# Altium PCB PCB.PcbDoc
Units mil, origin at the board's own origin, x right, y up, seen from the top; angles counter-clockwise.
Board outline 6000 x 4000 mil, 2 copper layers (Top Layer, Bottom Layer); 217 components, 93 nets, 539 pads, 0 vias.
Unrouted connection lines stored in the file: 429.
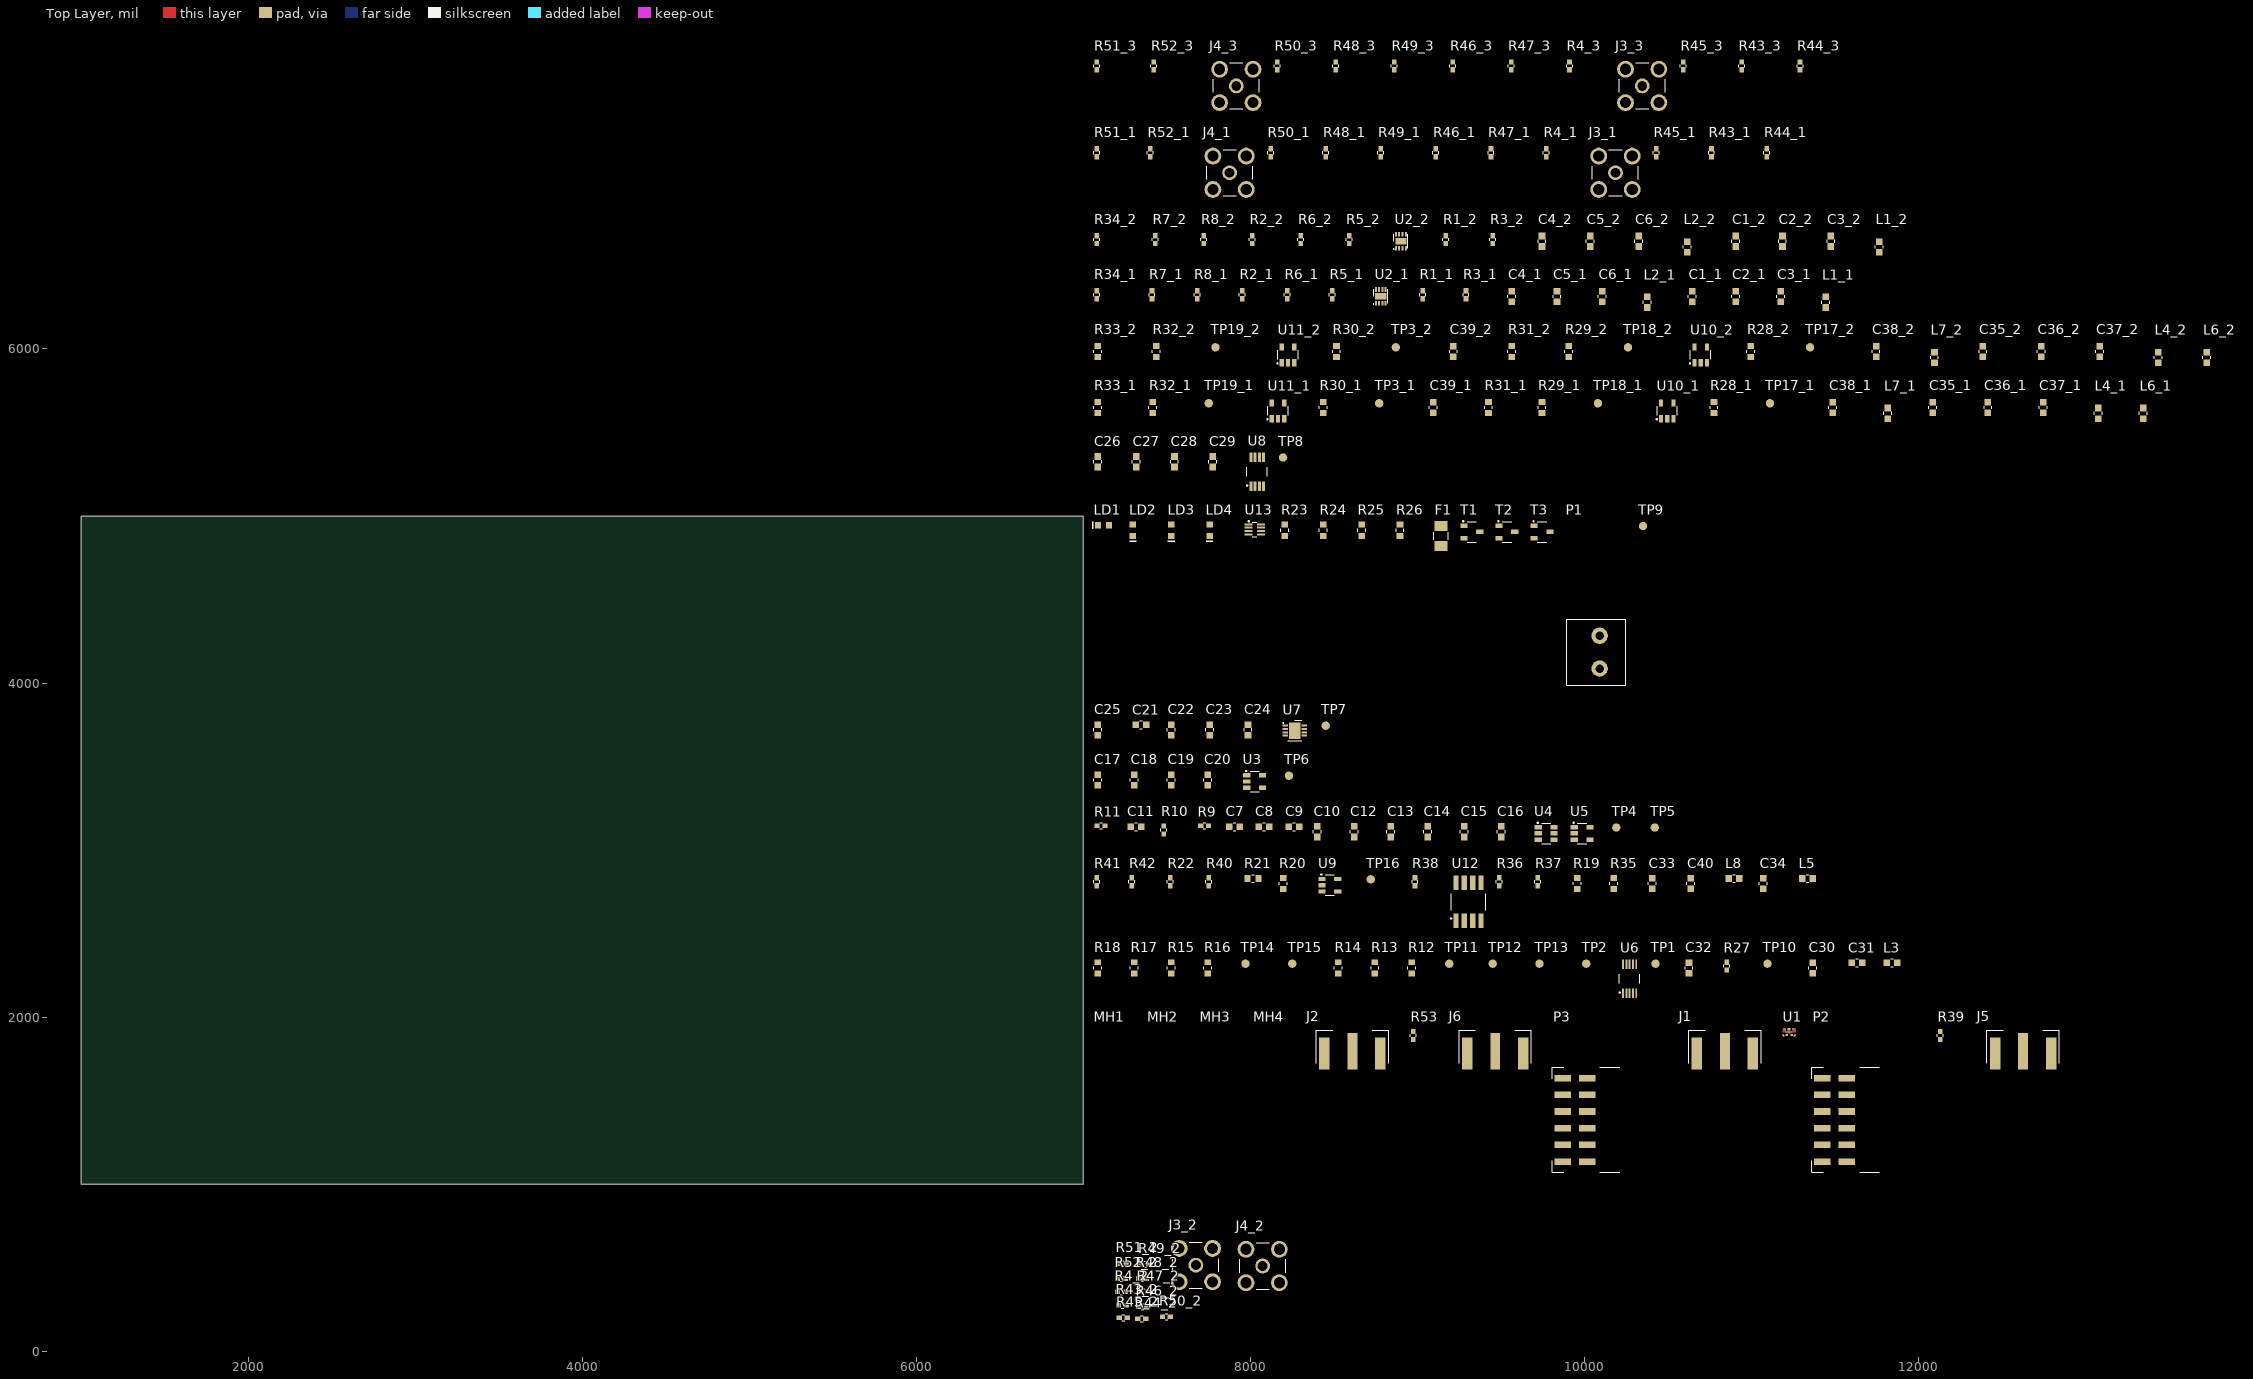
[diagram p0: Top Layer view]
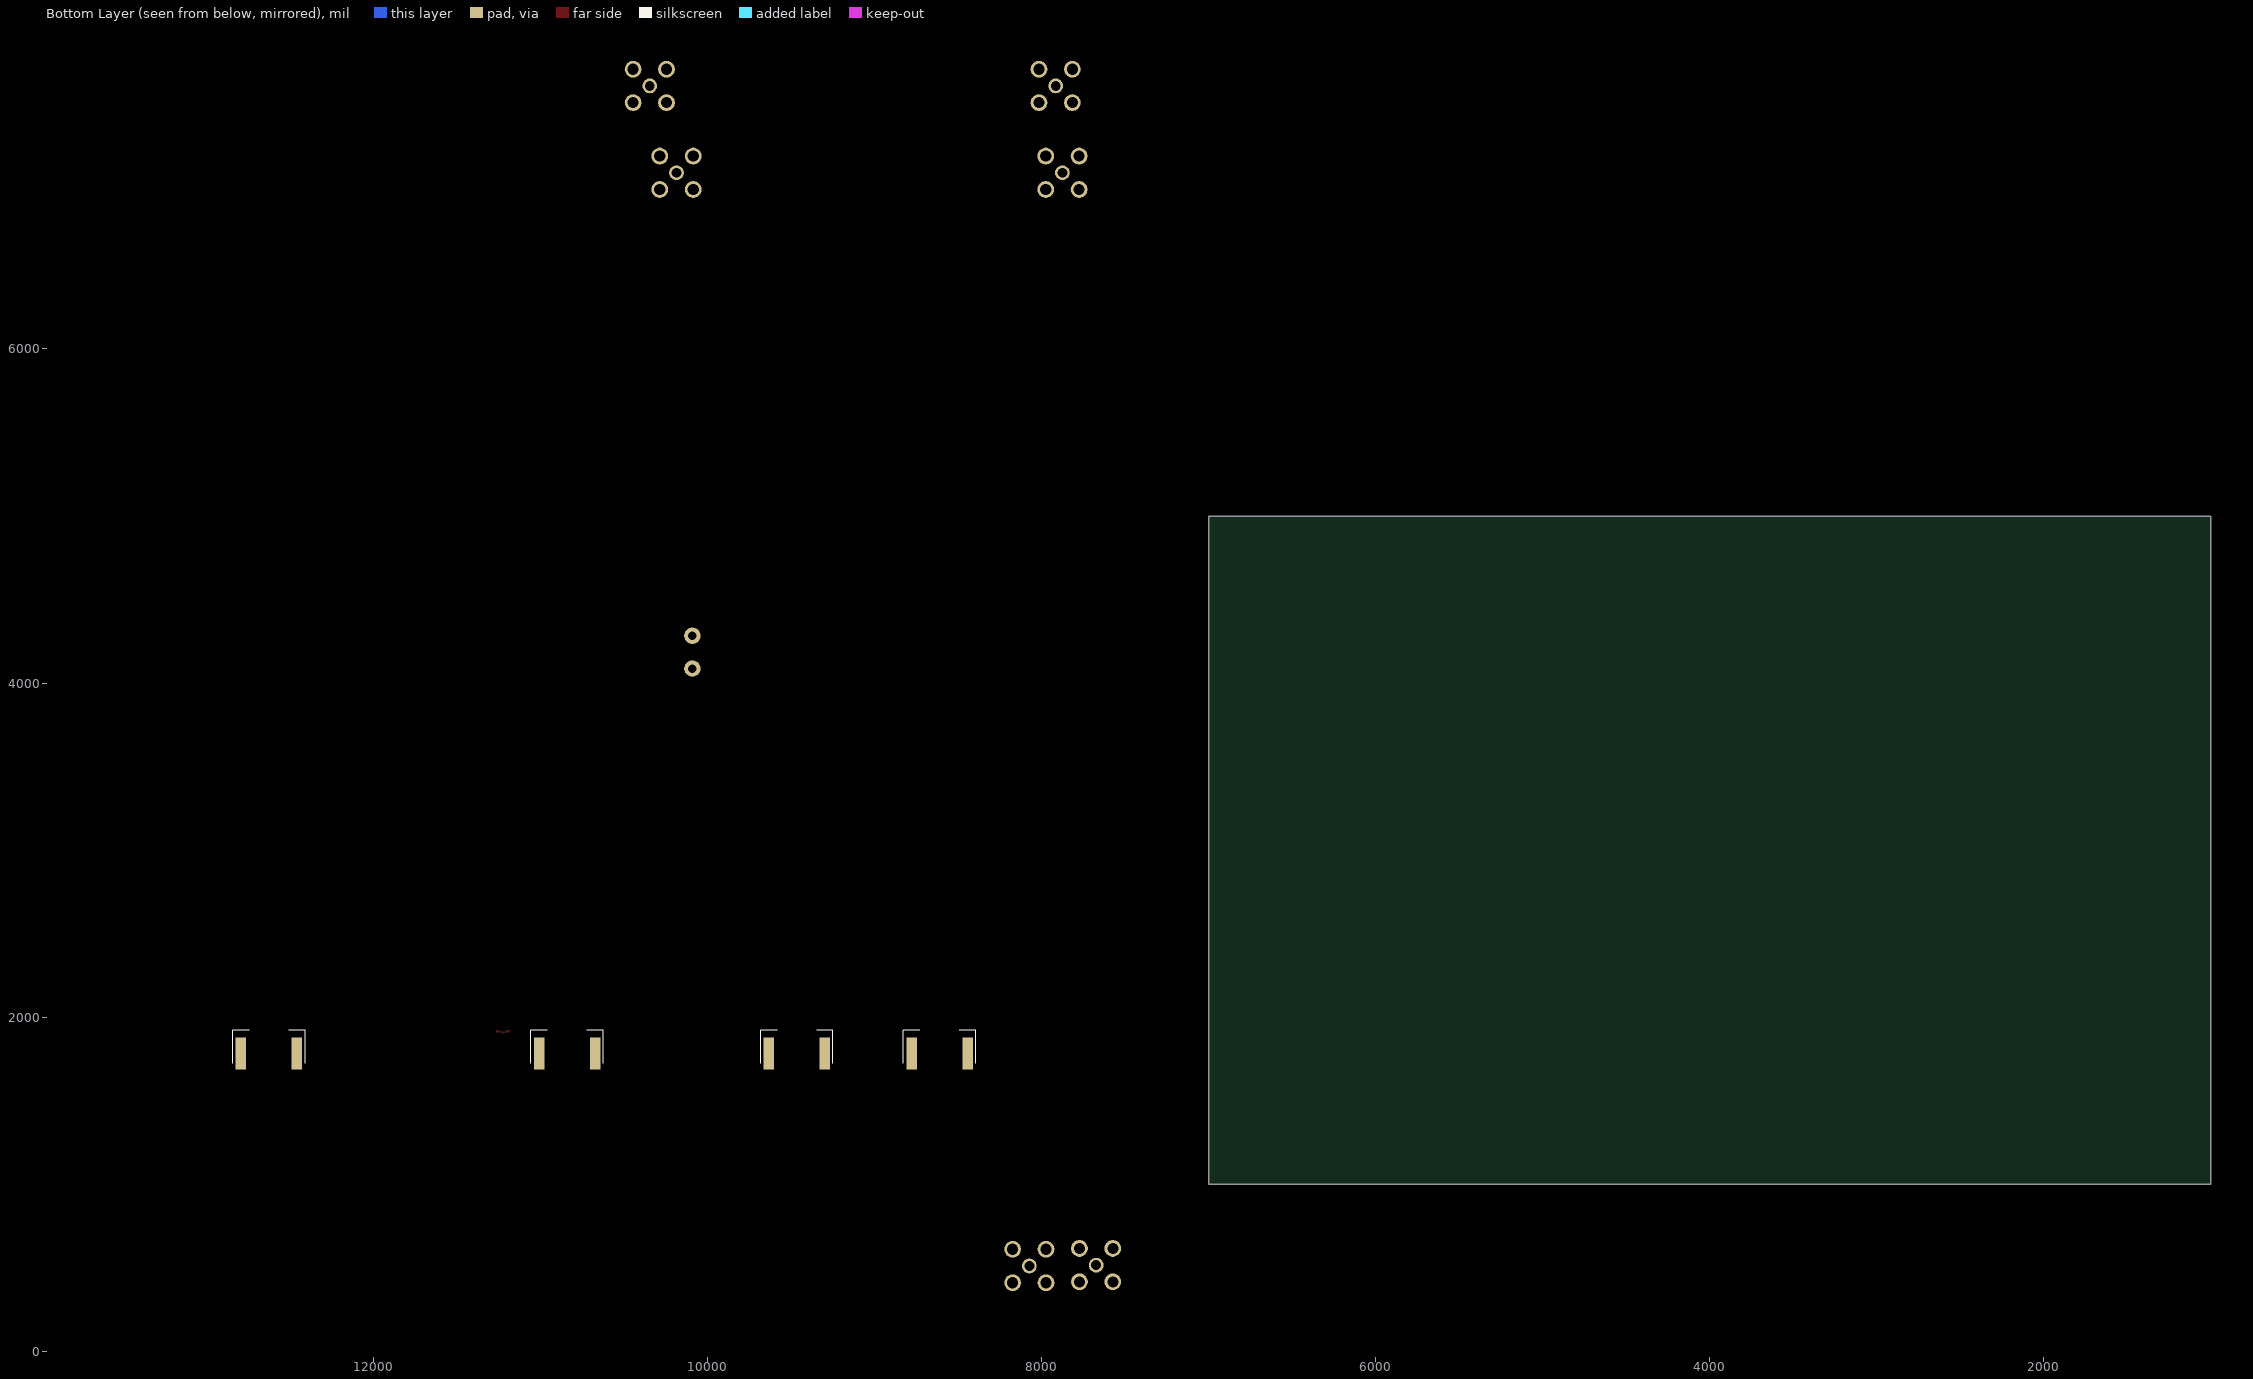
[diagram p1: Bottom Layer view, seen from below]

## Layer stack, top to bottom
Top Solder: solder mask 0.4, Solder Resist, Dk 3.5
Top Layer: signal copper 1.4
Dielectric 1: dielectric 12.6, FR-4, Dk 4.8
Bottom Layer: signal copper 1.4
Bottom Solder: solder mask 0.4, Solder Resist, Dk 3.5

## Board outline
1000,1000 7000,1000 7000,5000 1000,5000

## Design rules (kind name [scope] priority, off if disabled: settings)
Clearance [All] p1: gap=10 ignorepadtopadclearanceinfootprint=FALSE except(0: Arc-Hole Track-Hole SMDPad-Hole THPad-Hole Via-Hole Fill-Hole Poly-Hole Region-Hole Text-Hole)
DiffPairsRouting [All] p1: maxlimit=10 minlimit=10 mostfreqgap=10 toplayer_minwidth=15 toplayer_maxwidth=15 toplayer_prefwidth=15 bottomlayer_minwidth=15 bottomlayer_maxwidth=15 bottomlayer_prefwidth=15 maxuncoupledlength=500
PolygonConnect [All] p1: connectstyle=Relief reliefconductorwidth=10 reliefentries=4 polygonreliefangle="90 Angle" airgapwidth=10
RoomDefinition U_Resistive_Unequal_Power_DividerB2 [InComponentClass('U_Resistive_Unequal_Power_DividerB2')] p1: confinementstyle=ConfineIn formatcopy=TRUE lockcomponents=FALSE outline 7045,7395 11570,7395 11570,7865 7045,7865
RoomDefinition U_Resistive_Unequal_Power_DividerB1 [InComponentClass('U_Resistive_Unequal_Power_DividerB1')] p2: confinementstyle=ConfineIn formatcopy=TRUE lockcomponents=FALSE outline 7053.26,0 8497.76,0 8497.76,715.5 7053.26,715.5
RoomDefinition U_Resistive_Unequal_Power_DividerA [InComponentClass('U_Resistive_Unequal_Power_DividerA')] p3: confinementstyle=ConfineIn formatcopy=TRUE lockcomponents=FALSE outline 7045,6875 11350,6875 11350,7345 7045,7345
RoomDefinition U_Power_VREF_P1V25 [InComponentClass('U_Power_VREF_P1V25')] p4: confinementstyle=ConfineIn formatcopy=TRUE lockcomponents=FALSE outline 7045,5135 8345,5135 8345,5495 7045,5495
RoomDefinition U_Power_Supply [InComponentClass('U_Power_Supply')] p5: confinementstyle=ConfineIn formatcopy=TRUE lockcomponents=FALSE outline 7045,3940 10500,3940 10500,5085 7045,5085
RoomDefinition U_Power_P3V3 [InComponentClass('U_Power_P3V3')] p6: confinementstyle=ConfineIn formatcopy=TRUE lockcomponents=FALSE outline 7045,3640 8600,3640 8600,3890 7045,3890
RoomDefinition U_Power_P2V5 [InComponentClass('U_Power_P2V5')] p7: confinementstyle=ConfineIn formatcopy=TRUE lockcomponents=FALSE outline 7045,3330 8380,3330 8380,3590 7045,3590
RoomDefinition U_Power_N2V5 [InComponentClass('U_Power_N2V5')] p8: confinementstyle=ConfineIn formatcopy=TRUE lockcomponents=FALSE outline 7045,3020 10570,3020 10570,3280 7045,3280
RoomDefinition U_External_Trigger_Buffer [InComponentClass('U_External_Trigger_Buffer')] p9: confinementstyle=ConfineIn formatcopy=TRUE lockcomponents=FALSE outline 7045,2515 11440,2515 11440,2970 7045,2970
RoomDefinition U_DAC [InComponentClass('U_DAC')] p10: confinementstyle=ConfineIn formatcopy=TRUE lockcomponents=FALSE outline 7045,2095 11945,2095 11945,2465 7045,2465
RoomDefinition U_ComparatorB [InComponentClass('U_ComparatorB')] p11: confinementstyle=ConfineIn formatcopy=TRUE lockcomponents=FALSE outline 7045,6540 11970,6540 11970,6825 7045,6825
RoomDefinition U_ComparatorA [InComponentClass('U_ComparatorA')] p12: confinementstyle=ConfineIn formatcopy=TRUE lockcomponents=FALSE outline 7045,6210 11630,6210 11630,6495 7045,6495
RoomDefinition U_Bipolar_offset_shifterB [InComponentClass('U_Bipolar_offset_shifterB')] p13: confinementstyle=ConfineIn formatcopy=TRUE lockcomponents=FALSE outline 7045,5875 13940,5875 13940,6165 7045,6165
RoomDefinition U_Bipolar_offset_shifterA [InComponentClass('U_Bipolar_offset_shifterA')] p14: confinementstyle=ConfineIn formatcopy=TRUE lockcomponents=FALSE outline 7045,5540 13540,5540 13540,5830 7045,5830
RoomDefinition Main [InComponentClass('Main')] p15: confinementstyle=ConfineIn formatcopy=TRUE lockcomponents=FALSE outline 7045,1060 12920,1060 12920,2050 7045,2050
RoutingVias [All] p1: holewidth=28 width=50 viastyle="Through Hole" minholewidth=28 minwidth=50 maxholewidth=28 maxwidth=50
SolderMaskExpansion [All] p1: expansion=4 istentingtop=FALSE
Width [All] p1: maxlimit=10 minlimit=10 preferedwidth=10
29 further rules are at their usual default settings.

## Classes and differential pairs
channel class Resistive_Unequal_Power_Divider: U_Resistive_Unequal_Power_DividerA U_Resistive_Unequal_Power_DividerB1 U_Resistive_Unequal_Power_DividerB2
channel class Comparator: U_ComparatorA U_ComparatorB
channel class Bipolar_Offset_Shifter: U_Bipolar_offset_shifterA U_Bipolar_offset_shifterB
component class U_Resistive_Unequal_Power_DividerB2: J3_3 J4_3 R4_3 R43_3 R44_3 R45_3 R46_3 R47_3 R48_3 R49_3 R50_3 R51_3 R52_3
component class U_Resistive_Unequal_Power_DividerB1: J3_2 J4_2 R4_2 R43_2 R44_2 R45_2 R46_2 R47_2 R48_2 R49_2 R50_2 R51_2 R52_2
component class U_Resistive_Unequal_Power_DividerA: J3_1 J4_1 R4_1 R43_1 R44_1 R45_1 R46_1 R47_1 R48_1 R49_1 R50_1 R51_1 R52_1
component class U_Power_VREF_P1V25: C26 C27 C28 C29 TP8 U8
component class U_Power_Supply: F1 LD1 LD2 LD3 LD4 P1 R23 R24 R25 R26 T1 T2 T3 TP9 U13
component class U_Power_P3V3: C21 C22 C23 C24 C25 TP7 U7
component class U_Power_P2V5: C17 C18 C19 C20 TP6 U3
component class U_Power_N2V5: C7 C8 C9 C10 C11 C12 C13 C14 C15 C16 R9 R10 R11 TP4 TP5 U4 U5
component class U_External_Trigger_Buffer: C33 C34 C40 L5 L8 R19 R20 R21 R22 R35 R36 R37 R38 R40 R41 R42 TP16 U9 U12
component class U_DAC: C30 C31 C32 L3 R12 R13 R14 R15 R16 R17 R18 R27 TP1 TP2 TP10 TP11 TP12 TP13 TP14 TP15 U6
component class U_ComparatorB: C1_2 C2_2 C3_2 C4_2 C5_2 C6_2 L1_2 L2_2 R1_2 R2_2 R3_2 R5_2 R6_2 R7_2 R8_2 R34_2 U2_2
component class U_ComparatorA: C1_1 C2_1 C3_1 C4_1 C5_1 C6_1 L1_1 L2_1 R1_1 R2_1 R3_1 R5_1 R6_1 R7_1 R8_1 R34_1 U2_1
component class U_Bipolar_offset_shifterB: C35_2 C36_2 C37_2 C38_2 C39_2 L4_2 L6_2 L7_2 R28_2 R29_2 R30_2 R31_2 R32_2 R33_2 TP3_2 TP17_2 TP18_2 TP19_2 U10_2 U11_2
component class U_Bipolar_offset_shifterA: C35_1 C36_1 C37_1 C38_1 C39_1 L4_1 L6_1 L7_1 R28_1 R29_1 R30_1 R31_1 R32_1 R33_1 TP3_1 TP17_1 TP18_1 TP19_1 U10_1 U11_1
component class Main: J1 J2 J5 J6 MH1 MH2 MH3 MH4 P2 P3 R39 R53 U1
differential pair COMP2_OUT: +COMP2_OUT_P -COMP2_OUT_N
differential pair COMP1_OUT: +COMP1_OUT_P -COMP1_OUT_N
differential pair BUF_OUT_ZBRD: +BUF_OUT_ZBRD_P -BUF_OUT_ZBRD_N

## Components (designator, comment, footprint, x,y, rotation, side; value= is the part's Value field where it differs from the comment)
C1_1 "1uF" CAPC0603X90N 10645,6315 r90 top (schematic designator C1)
C1_2 "1uF" CAPC0603X90N 10905,6645 r90 top (schematic designator C1)
C2_1 "100nF" CAPC0603X90N 10905,6315 r90 top (schematic designator C2)
C2_2 "100nF" CAPC0603X90N 11185,6645 r90 top (schematic designator C2)
C3_1 "100pF" CAPC0603X90N 11175,6315 r90 top (schematic designator C3)
C3_2 "100pF" CAPC0603X90N 11475,6645 r90 top (schematic designator C3)
C4_1 "1uF" CAPC0603X90N 9565,6315 r90 top (schematic designator C4)
C4_2 "1uF" CAPC0603X90N 9745,6645 r90 top (schematic designator C4)
C5_1 "100nF" CAPC0603X90N 9835,6315 r90 top (schematic designator C5)
C5_2 "100nF" CAPC0603X90N 10035,6645 r90 top (schematic designator C5)
C6_1 "100pF" CAPC0603X90N 10105,6315 r90 top (schematic designator C6)
C6_2 "100pF" CAPC0603X90N 10325,6645 r90 top (schematic designator C6)
C7 "2.2uF" CAPC0603X90N 7905,3140 r0 top
C8 "100nF" CAPC0603X90N 8080,3140 r0 top
C9 "100nF" CAPC0603X90N 8260,3140 r0 top
C10 "2.2uF" CAPC0603X90N 8400,3110 r90 top
C11 "1uF" CAPC0603X90N 7315,3140 r0 top
C12 "2.2uF" CAPC0603X90N 8620,3110 r90 top
C13 "100nF" CAPC0603X90N 8840,3110 r90 top
C14 "DNP" CAPC0603X90N 9060,3110 r90 top
C15 "100nF" CAPC0603X90N 9280,3110 r90 top
C16 "2.2uF" CAPC0603X90N 9500,3110 r90 top
C17 "2.2uF" CAPC0603X90N 7085,3420 r90 top
C18 "100nF" CAPC0603X90N 7305,3420 r90 top
C19 "100nF" CAPC0603X90N 7525,3420 r90 top
C20 "2.2uF" CAPC0603X90N 7745,3420 r90 top
C21 "4.7uF" CAPC0603X90N 7345,3750 r0 top
C22 "100nF" CAPC0603X90N 7525,3720 r90 top
C23 "100nF" CAPC0603X90N 7755,3720 r90 top
C24 "4.7uF" CAPC0603X90N 7985,3720 r90 top
C25 "DNP" CAPC0603X90N 7085,3720 r90 top
C26 "1uF" CAPC0603X90N 7085,5325 r90 top
C27 "100nF" CAPC0603X90N 7315,5325 r90 top
C28 "100nF" CAPC0603X90N 7545,5325 r90 top
C29 "1uF" CAPC0603X90N 7775,5325 r90 top
C30 "10uF" CAPC0603X90N 11365,2295 r90 top
C31 "100nF" CAPC0603X90N 11630,2325 r0 top
C32 "100nF" CAPC0603X90N 10625,2295 r90 top
C33 "1uF" CAPC0603X90N 10405,2800 r90 top
C34 "100nF" CAPC0603X90N 11070,2800 r90 top
C35_1 "100nF" CAPC0603X90N 12085,5650 r90 top (schematic designator C35)
C35_2 "100nF" CAPC0603X90N 12385,5985 r90 top (schematic designator C35)
C36_1 "100nF" CAPC0603X90N 12415,5650 r90 top (schematic designator C36)
C36_2 "100nF" CAPC0603X90N 12735,5985 r90 top (schematic designator C36)
C37_1 "100nF" CAPC0603X90N 12745,5650 r90 top (schematic designator C37)
C37_2 "100nF" CAPC0603X90N 13085,5985 r90 top (schematic designator C37)
C38_1 "100nF" CAPC0603X90N 11485,5650 r90 top (schematic designator C38)
C38_2 "100nF" CAPC0603X90N 11745,5985 r90 top (schematic designator C38)
C39_1 "DNP" CAPC0603X90N 9095,5650 r90 top (schematic designator C39)
C39_2 "DNP" CAPC0603X90N 9215,5985 r90 top (schematic designator C39)
C40 "100nF" CAPC0603X90N 10635,2800 r90 top
F1 "C1Q 1.5" FUSE1206 9140,4880 r90 top
J1 "CONSMA020.062-G" CONSMA020.062-G 10840,1685 r0 top
J2 "CONSMA020.062-G" CONSMA020.062-G 8610,1685 r0 top
J3_1 "901-144-8RFX" 901-144-8RFX 10185,7055 r0 top (schematic designator J3)
J3_2 "901-144-8RFX" 901-144-8RFX 7672.76,515 r0 top (schematic designator J3)
J3_3 "901-144-8RFX" 901-144-8RFX 10345,7575 r0 top (schematic designator J3)
J4_1 "901-144-8RFX" 901-144-8RFX 7875,7055 r0 top (schematic designator J4)
J4_2 "901-144-8RFX" 901-144-8RFX 8072.76,510 r0 top (schematic designator J4)
J4_3 "901-144-8RFX" 901-144-8RFX 7915,7575 r0 top (schematic designator J4)
J5 "CONSMA020.062-G" CONSMA020.062-G 12625,1685 r0 top
J6 "CONSMA020.062-G" CONSMA020.062-G 9465,1685 r0 top
L1_1 "120R@100MHz" INDC0603X90N 11445,6280 r90 top (schematic designator L1)
L1_2 "120R@100MHz" INDC0603X90N 11765,6610 r90 top (schematic designator L1)
L2_1 "120R@100MHz" INDC0603X90N 10375,6280 r90 top (schematic designator L2)
L2_2 "120R@100MHz" INDC0603X90N 10615,6610 r90 top (schematic designator L2)
L3 "120R@100MHz" INDC0603X90N 11840,2325 r0 top
L4_1 "120R@100MHz" INDC0603X90N 13075,5615 r90 top (schematic designator L4)
L4_2 "120R@100MHz" INDC0603X90N 13435,5950 r90 top (schematic designator L4)
L5 "120R@100MHz" INDC0603X90N 11335,2830 r0 top
L6_1 "120R@100MHz" INDC0603X90N 13345,5615 r90 top (schematic designator L6)
L6_2 "120R@100MHz" INDC0603X90N 13725,5950 r90 top (schematic designator L6)
L7_1 "120R@100MHz" INDC0603X90N 11815,5615 r90 top (schematic designator L7)
L7_2 "120R@100MHz" INDC0603X90N 12095,5950 r90 top (schematic designator L7)
L8 "120R@100MHz" INDC0603X90N 10895,2830 r0 top
LD1 "Green" LED_0603X60N 7120,4945 r0 top
LD2 "Green" LED_0603X60N 7295,4915 r90 top
LD3 "Green" LED_0603X60N 7525,4915 r90 top
LD4 "Green" LED_0603X60N 7755,4915 r90 top
MH1 "M3" MH-M3 7185,1810 r0 top
MH2 "M3" MH-M3 7505,1810 r0 top
MH3 "M3" MH-M3 7820,1810 r0 top
MH4 "M3" MH-M3 8140,1810 r0 top
P1 "SCREWTERM_THT_2X1H_5P08MM" SCREWERM_THT_2X1H_5P08MM 10090,4185 r90 top
P2 "WURTH_610112249121" WURTH_610112249121 11745,1385 r90 top
P3 "WURTH_610112249121" WURTH_610112249121 10190,1385 r90 top
R1_1 "DNP" RESC0402X40N 9030,6325 r90 top (schematic designator R1)
R1_2 "DNP" RESC0402X40N 9170,6655 r90 top (schematic designator R1)
R2_1 "49R9" RESC0402X40N 7950,6325 r90 top (schematic designator R2)
R2_2 "49R9" RESC0402X40N 8010,6655 r90 top (schematic designator R2)
R3_1 "DNP" RESC0402X40N 9290,6325 r90 top (schematic designator R3)
R3_2 "DNP" RESC0402X40N 9450,6655 r90 top (schematic designator R3)
R4_1 "DNP" RESC0402X40N 9770,7175 r90 top (schematic designator R4)
R4_2 "DNP" RESC0402X40N 7227.76,355 r0 top (schematic designator R4)
R4_3 "DNP" RESC0402X40N 9910,7695 r90 top (schematic designator R4)
R5_1 "0R" RESC0402X40N 8490,6325 r90 top (schematic designator R5)
R5_2 "0R" RESC0402X40N 8590,6655 r90 top (schematic designator R5)
R6_1 "0R" RESC0402X40N 8220,6325 r90 top (schematic designator R6)
R6_2 "0R" RESC0402X40N 8300,6655 r90 top (schematic designator R6)
R7_1 "DNP" RESC0402X40N 7410,6325 r90 top (schematic designator R7)
R7_2 "DNP" RESC0402X40N 7430,6655 r90 top (schematic designator R7)
R8_1 "DNP" RESC0402X40N 7680,6325 r90 top (schematic designator R8)
R8_2 "DNP" RESC0402X40N 7720,6655 r90 top (schematic designator R8)
R9 "DNP" RESC0402X40N 7725,3145 r0 top
R10 "DNP" RESC0402X40N 7480,3120 r90 top
R11 "DNP" RESC0402X40N 7105,3145 r0 top
R12 "27R" RESC0603X60N 8965,2295 r90 top
R13 "27R" RESC0603X60N 8745,2295 r90 top
R14 "27R" RESC0603X60N 8525,2295 r90 top
R15 "10k" RESC0603X60N 7525,2295 r90 top
R16 "10k" RESC0603X60N 7745,2295 r90 top
R17 "27R" RESC0603X60N 7305,2295 r90 top
R18 "27R" RESC0603X60N 7085,2295 r90 top
R19 "DNP" RESC0603X60N 9955,2800 r90 top
R20 "27R" RESC0603X60N 8195,2800 r90 top
R21 "0R" RESC0603X60N 8015,2830 r0 top
R22 "49R9" RESC0402X40N 7520,2810 r90 top
R23 "1k" RESC0603X60N 8205,4915 r90 top
R24 "100R" RESC0603X60N 8435,4915 r90 top
R25 "100R" RESC0603X60N 8665,4915 r90 top
R26 "100R" RESC0603X60N 8895,4915 r90 top
R27 "0R" RESC0402X40N 10850,2305 r90 top
R28_1 "100k" RESC0603X60N 10775,5650 r90 top (schematic designator R28)
R28_2 "100k" RESC0603X60N 10995,5985 r90 top (schematic designator R28)
R29_1 "10k" RESC0603X60N 9745,5650 r90 top (schematic designator R29)
R29_2 "10k" RESC0603X60N 9905,5985 r90 top (schematic designator R29)
R30_1 "100k" RESC0603X60N 8435,5650 r90 top (schematic designator R30)
R30_2 "100k" RESC0603X60N 8515,5985 r90 top (schematic designator R30)
R31_1 "10k" RESC0603X60N 9425,5650 r90 top (schematic designator R31)
R31_2 "10k" RESC0603X60N 9565,5985 r90 top (schematic designator R31)
R32_1 "10k" RESC0603X60N 7415,5650 r90 top (schematic designator R32)
R32_2 "10k" RESC0603X60N 7435,5985 r90 top (schematic designator R32)
R33_1 "10k" RESC0603X60N 7085,5650 r90 top (schematic designator R33)
R33_2 "10k" RESC0603X60N 7085,5985 r90 top (schematic designator R33)
R34_1 "49R9" RESC0402X40N 7080,6325 r90 top (schematic designator R34)
R34_2 "49R9" RESC0402X40N 7080,6655 r90 top (schematic designator R34)
R35 "DNP" RESC0603X60N 10175,2800 r90 top
R36 "DNP" RESC0402X40N 9490,2810 r90 top
R37 "DNP" RESC0402X40N 9720,2810 r90 top
R38 "0R" RESC0402X40N 8985,2810 r90 top
R39 "DNP" RESC0402X40N 12130,1890 r90 top
R40 "0R" RESC0402X40N 7750,2810 r90 top
R41 "DNP" RESC0402X40N 7080,2810 r90 top
R42 "DNP" RESC0402X40N 7290,2810 r90 top
R43_1 "1R43" RESC0402X40N 10760,7175 r90 top (schematic designator R43)
R43_2 "1R43" RESC0402X40N 7232.76,275 r0 top (schematic designator R43)
R43_3 "1R43" RESC0402X40N 10940,7695 r90 top (schematic designator R43)
R44_1 "1R43" RESC0402X40N 11090,7175 r90 top (schematic designator R44)
R44_2 "1R43" RESC0402X40N 7349.13,195 r0 top (schematic designator R44)
R44_3 "1R43" RESC0402X40N 11290,7695 r90 top (schematic designator R44)
R45_1 "845R" RESC0402X40N 10430,7175 r90 top (schematic designator R45)
R45_2 "845R" RESC0402X40N 7237.76,200 r0 top (schematic designator R45)
R45_3 "845R" RESC0402X40N 10590,7695 r90 top (schematic designator R45)
R46_1 "53R6" RESC0402X40N 9110,7175 r90 top (schematic designator R46)
R46_2 "53R6" RESC0402X40N 7354.13,265 r0 top (schematic designator R46)
R46_3 "53R6" RESC0402X40N 9210,7695 r90 top (schematic designator R46)
R47_1 "DNP" RESC0402X40N 9440,7175 r90 top (schematic designator R47)
R47_2 "DNP" RESC0402X40N 7359.13,355 r0 top (schematic designator R47)
R47_3 "DNP" RESC0402X40N 9560,7695 r90 top (schematic designator R47)
R48_1 "1R43" RESC0402X40N 8450,7175 r90 top (schematic designator R48)
R48_2 "1R43" RESC0402X40N 7354.13,435 r0 top (schematic designator R48)
R48_3 "1R43" RESC0402X40N 8510,7695 r90 top (schematic designator R48)
R49_1 "1R43" RESC0402X40N 8780,7175 r90 top (schematic designator R49)
R49_2 "1R43" RESC0402X40N 7367.76,520 r0 top (schematic designator R49)
R49_3 "1R43" RESC0402X40N 8860,7695 r90 top (schematic designator R49)
R50_1 "845R" RESC0402X40N 8120,7175 r90 top (schematic designator R50)
R50_2 "845R" RESC0402X40N 7496.38,205 r0 top (schematic designator R50)
R50_3 "845R" RESC0402X40N 8160,7695 r90 top (schematic designator R50)
R51_1 "53R6" RESC0402X40N 7080,7175 r90 top (schematic designator R51)
R51_2 "53R6" RESC0402X40N 7232.76,525 r0 top (schematic designator R51)
R51_3 "53R6" RESC0402X40N 7080,7695 r90 top (schematic designator R51)
R52_1 "DNP" RESC0402X40N 7400,7175 r90 top (schematic designator R52)
R52_2 "DNP" RESC0402X40N 7227.76,435 r0 top (schematic designator R52)
R52_3 "DNP" RESC0402X40N 7420,7695 r90 top (schematic designator R52)
R53 "DNP" RESC0402X40N 8975,1890 r90 top
T1 "AO3401A" SOT23-3 9325,4905 r0 top
T2 "AO3406" SOT23-3 9535,4905 r0 top
T3 "AO3406" SOT23-3 9745,4905 r0 top
TP1 "TestPoint" TESTPOINT_SMD_C1P27MM 10425,2320 r0 top
TP2 "TestPoint" TESTPOINT_SMD_C1P27MM 10010,2320 r90 top
TP3_1 "TestPoint" TESTPOINT_SMD_C1P27MM 8770,5675 r90 top (schematic designator TP3)
TP3_2 "TestPoint" TESTPOINT_SMD_C1P27MM 8870,6010 r90 top (schematic designator TP3)
TP4 "TestPoint" TESTPOINT_SMD_C1P27MM 10190,3135 r90 top
TP5 "TestPoint" TESTPOINT_SMD_C1P27MM 10420,3135 r90 top
TP6 "TestPoint" TESTPOINT_SMD_C1P27MM 8230,3445 r90 top
TP7 "TestPoint" TESTPOINT_SMD_C1P27MM 8450,3745 r90 top
TP8 "TestPoint" TESTPOINT_SMD_C1P27MM 8195,5350 r90 top
TP9 "TestPoint" TESTPOINT_SMD_C1P27MM 10350,4940 r90 top
TP10 "TestPoint" TESTPOINT_SMD_C1P27MM 11095,2320 r90 top
TP11 "TestPoint" TESTPOINT_SMD_C1P27MM 9190,2320 r90 top
TP12 "TestPoint" TESTPOINT_SMD_C1P27MM 9450,2320 r90 top
TP13 "TestPoint" TESTPOINT_SMD_C1P27MM 9730,2320 r90 top
TP14 "TestPoint" TESTPOINT_SMD_C1P27MM 7970,2320 r90 top
TP15 "TestPoint" TESTPOINT_SMD_C1P27MM 8250,2320 r90 top
TP16 "TestPoint" TESTPOINT_SMD_C1P27MM 8720,2825 r90 top
TP17_1 "TestPoint" TESTPOINT_SMD_C1P27MM 11110,5675 r90 top (schematic designator TP17)
TP17_2 "TestPoint" TESTPOINT_SMD_C1P27MM 11350,6010 r90 top (schematic designator TP17)
TP18_1 "TestPoint" TESTPOINT_SMD_C1P27MM 10080,5675 r90 top (schematic designator TP18)
TP18_2 "TestPoint" TESTPOINT_SMD_C1P27MM 10260,6010 r90 top (schematic designator TP18)
TP19_1 "TestPoint" TESTPOINT_SMD_C1P27MM 7750,5675 r90 top (schematic designator TP19)
TP19_2 "TestPoint" TESTPOINT_SMD_C1P27MM 7790,6010 r90 top (schematic designator TP19)
U1 "PS1608GT2-R50-T1" PS1608GT2R50T1 11225,1910 r0 top
U2_1 "TLV3801" WSON50P200X200X80-9N 8780,6315 r90 top (schematic designator U2)
U2_2 "TLV3801" WSON50P200X200X80-9N 8900,6645 r90 top (schematic designator U2)
U3 "ADM7160AUJZ-2.5" SOT23-5 8025,3410 r0 top
U4 "LM2776" SOT23-6 9770,3100 r0 top
U5 "ADP7182AUJZ-2.5" SOT23-5 9985,3100 r0 top
U6 "AD5623RBRMZ-3" MSOP50P490X110-10N 10270,2230 r90 top
U7 "ADM7170ACPZ-3.3" LFCSP50P300X300X80-9N-D 8265,3715 r0 top
U8 "LTC6652BHMS8-1.25" MSOP65P490X110-8N 8040,5265 r90 top
U9 "SN74LVC1G04MDBVREP" SOT23-5 8475,2790 r0 top
U10_1 "TLV333IDBV" SOT23-5 10495,5630 r90 top (schematic designator U10)
U10_2 "TLV333IDBV" SOT23-5 10695,5965 r90 top (schematic designator U10)
U11_1 "TLV333IDBV" SOT23-5 8165,5630 r90 top (schematic designator U11)
U11_2 "TLV333IDBV" SOT23-5 8225,5965 r90 top (schematic designator U11)
U12 "ADN4661BRZ" SOIC-8 9305,2690 r90 top
U13 "LTC4360ISC8-2" SC70-8 8025,4920 r0 top

## Footprints (in the part's own frame and the unit in brackets; to place one, negate y for a bottom-side part, rotate by r counter-clockwise, add the part's x,y. Pads: shape width x height; smd on the part's side, far side on the other; paste and mask are expansions set on the pad)
901-144-8RFX [mm] "SMA, Straight, 50 Ohm"
  round 2.25 hole 1.5: 1(0,0)
  round 2.55 hole 1.7: 2(-2.54,-2.54) 2(-2.54,2.54) 2(2.54,-2.54) 2(2.54,2.54)
  silkscreen extent -3.5,-3.5 3.5,3.5, body extent -3.5,-3.5 3.5,3.5, height 9.53
CAPC0603X90N [mm] "Chip Capacitor, Body 1.6x0.8mm, IPC Medium Density"
  rect 1x1 smd: 1(-0.8,0) 2(0.8,0)
  silkscreen extent -0.2,-0.6 0.2,0.6, body extent -0.8,-0.4 0.8,0.4, height 0.9
CONSMA020.062-G [mm] "SMA FEMALE EDGE MOUNT FOR 0.062\" BOARD"
  rect 1.5x5.6 smd: 1(0,2.8)
  rect 1.6x4.9 smd: 2(-4.26,2.45) 2(4.26,2.45)
  rect 1.6x4.9 smd far side: 2(-4.26,2.45) 2(4.26,2.45)
  silkscreen extent -5.5,1 5.5,6, body extent -4.76,-9.5 4.76,4.7, height 4.35
FUSE1206 [mm] "Surface Mount Fuses 1206 SMT Fuse Very Fast Acting"
  rect 1.52x2.03 smd: 1(-1.52,0) 2(1.52,0)
  silkscreen extent -0.55,-1.1 0.55,1.1, body extent -1.6,-0.79 1.6,0.79, height 0.78
INDC0603X90N [mm] "Chip Inductor, Body 1.6x0.8mm, IPC Medium Density"
  rect 1x1 smd: 1(-0.8,0) 2(0.8,0)
  silkscreen extent -0.2,-0.6 0.2,0.6, body extent -0.8,-0.4 0.8,0.4, height 0.9
LED_0603X60N [mm] "Chip LED, 2-Leads, Body 1.6x0.8mm, IPC Medium Density"
  rect 0.9x1 smd: 1(-0.85,0) 2(0.85,0)
  silkscreen extent -1.65,-0.51 -1.65,0.49, body extent -0.8,-0.4 0.8,0.4, height 0.6
LFCSP50P300X300X80-9N-D [mm] "LFCSP50P300X300X80-9N-D / LFCSP, 8-Leads, Body 3x3mm, Pitch 0.5mm, Exposed Pad"
  rect 0.85x0.3 smd: 1(-1.45,0.75) 2(-1.45,0.25) 3(-1.45,-0.25) 4(-1.45,-0.75) 5(1.45,-0.75) 6(1.45,-0.25) 7(1.45,0.25) 8(1.45,0.75)
  rect 1.7x2.54 smd: 9(0,0)
  silkscreen extent -1.8,-1.55 1.05,1.55, body extent -1.55,-1.5 1.55,1.5, height 0.8
MH-M3 [mm] "M3 screw Mounting Hole"
  round 0 hole 3.2 unplated mask+1.8: MH(0,0)
MSOP50P490X110-10N [mm] "MSOP, 10-Leads, Body 3x3mm, Pitch 0.5mm"
  rect 1.45x0.3 smd: 1(-2.225,1) 2(-2.225,0.5) 3(-2.225,0) 4(-2.225,-0.5) 5(-2.225,-1) 6(2.225,-1) 7(2.225,-0.5) 8(2.225,0) 9(2.225,0.5) 10(2.225,1)
  silkscreen extent -2.15,-1.55 0.7,1.57, body extent -2.45,-1.5 2.45,1.5, height 1.1
MSOP65P490X110-8N [mm] "MSOP65P490X110-8N / MSOP, 8-Leads, Body 3x3mm, Pitch 0.65mm"
  rect 1.425x0.45 smd: 1(-2.212,0.975) 2(-2.212,0.325) 3(-2.212,-0.325) 4(-2.212,-0.975) 5(2.212,-0.975) 6(2.212,-0.325) 7(2.212,0.325) 8(2.212,0.975)
  silkscreen extent -2.15,-1.55 0.7,1.57, body extent -2.45,-1.5 2.45,1.5, height 1.1
PS1608GT2R50T1 [mm] "Resistive type power splitter"
  rect 0.45x0.35 smd: 1(0,0.425)
  rect 0.35x0.35 smd: 2(-0.375,-0.425) 3(0.375,-0.425)
  round 0.025 smd: 4(0,0)
  rect 1.05x0.1 smd: ""(0,0)
  Top Layer region: 0.525,0.05 0.525,0.25 1,0.25 1,-0.05 0.1,-0.05 0.1,-0.25 -0.1,-0.25 -0.1,-0.05 -1,-0.05 -1,0.25 -0.525,0.25 -0.525,0.05 -0.525,0.05
  silkscreen extent -0.92,-0.53 0.92,0.5, body extent -0.97,-0.57 0.97,0.57, height 0.6
RESC0402X40N [mm] "Chip Resistor, Body 1.1x0.5mm, IPC Medium Density"
  rect 0.8x0.7 smd: 1(-0.6,0) 2(0.6,0)
  silkscreen extent -0.2,-0.45 0.2,0.45, body extent -0.5,-0.25 0.5,0.25, height 0.35
RESC0603X60N [mm] "Chip Resistor, Body 1.6x0.8mm, IPC Medium Density"
  rect 0.9x1 smd: 1(-0.85,0) 2(0.85,0)
  silkscreen extent -0.2,-0.6 0.2,0.6, body extent -0.77,-0.42 0.78,0.43, height 0.45
SC70-8 [mm] "SOT50P210X100 / SC70, 8-Leads, Body 2x1.25mm, Pitch 0.5mm"
  rect 1.2x0.3 smd: 1(-0.95,0.75) 2(-0.95,0.25) 3(-0.95,-0.25) 4(-0.95,-0.75) 5(0.95,-0.75) 6(0.95,-0.25) 7(0.95,0.25) 8(0.95,0.75)
  silkscreen extent -0.95,-1.1 0.35,1.3, body extent -1.05,-1 1.05,1, height 1
SCREWERM_THT_2X1H_5P08MM [mm] "Terminal Block, Right angle, 2 Positions, THT, Screw Connection, 10x9mm body"
  round 2.5 hole 1.3: 1(-2.5,0) 2(2.5,0)
  silkscreen extent -5,-4 5,5, body extent -5.7,-4 5,5, height 12.5
SOIC-8 [mm] "SOIC, 8-Leads, Body 3.9x4.9mm, Pitch 1.27mm,"
  rect 2.2x0.8 smd: 1(-2.87,1.905) 2(-2.87,0.635) 3(-2.87,-0.635) 4(-2.87,-1.905) 5(2.87,-1.905) 6(2.87,-0.635) 7(2.87,0.635) 8(2.87,1.905)
  silkscreen extent -2.59,-2.6 1.25,2.69, body extent -3.1,-2.5 3.1,2.5, height 1.76
SOT23-3 [mm] "SOT, 3-Leads, Body 2.9x1.6mm, Pitch 0.95mm, IPC Medium Density"
  rect 1.1x0.65 smd: 1(-1.2,0.95) 2(-1.2,-0.95) 3(1.2,0)
  silkscreen extent -1.34,-1.55 0.7,1.66, body extent -1.4,-1.45 1.4,1.45, height 1.3
SOT23-5 [mm] "SOT, 5-Leads, Body 2.9x1.6mm, Pitch 0.95mm, IPC Medium Density"
  rect 1.1x0.65 smd: 1(-1.2,0.95) 2(-1.2,0) 3(-1.2,-0.95) 4(1.2,-0.95) 5(1.2,0.95)
  silkscreen extent -1.34,-1.55 0.7,1.66, body extent -1.27,-1.5 1.23,1.5, height 1.05
SOT23-6 [mm] "SOT, 6-Leads, Body 2.9x1.6mm, Pitch 0.95mm, IPC Medium Density"
  rect 1.1x0.65 smd: 1(-1.2,0.95) 2(-1.2,0) 3(-1.2,-0.95) 4(1.2,-0.95) 5(1.2,0) 6(1.2,0.95)
  silkscreen extent -1.34,-1.55 0.7,1.66, body extent -1.4,-1.45 1.4,1.45, height 1.45
TESTPOINT_SMD_C1P27MM [mil] "1.27mm diameter SMD Test Point Area"
  round 50 smd paste-50: 1(0,0)
WSON50P200X200X80-9N [mm] "WSON50P200X200X80-9N /  / WSON, 8-Leads, Body 2x2mm, Pitch 0.5mm, Exposed Pad"
  rect 0.7x0.3 smd: 1(-1.05,0.75) 2(-1.05,0.25) 3(-1.05,-0.25) 4(-1.05,-0.75) 5(1.05,-0.75) 6(1.05,-0.25) 7(1.05,0.25) 8(1.05,0.75)
  rect 1x1.7 smd: 9(0,0)
  silkscreen extent -1.24,-1.05 1.05,1.14, body extent -0.99,-1.02 1.01,0.98, height 0.77
WURTH_610112249121 [mm] "WR-PHD SMT Angled Dual Pin / Header, 2.54mm, 2x6"
  rect 1x2.5 smd: 1(6.35,4.45) 2(6.35,8.15) 3(3.81,4.45) 4(3.81,8.15) 5(1.27,4.45) 6(1.27,8.15) 7(-1.27,4.45) 8(-1.27,8.15) 9(-3.81,4.45) 10(-3.81,8.15) 11(-6.35,4.45) 12(-6.35,8.15)
  round 1.68 hole 1.95 unplated mask+0.178: ""(-5.08,0) ""(5.08,0)
  silkscreen extent -8,-0.5 8,9.75, body extent -7.62,-7.27 7.62,8.89, height 5.08

## Part data
C1_1 C1_2 C4_1 C4_2 C11 C26 C29 C33: library part CC0603_1UF_16V_10%_X7R, "Non-polarised capacitor", Manufacturer Part Number=CL10B105KO8NNNC, DesignItemId=CC0603_1UF_16V_10%_X7R, Height=0.8mm, HelpURL=https://www.mouser.pl/datasheet/2/585/MLCC-1837944.pdf, SMD=Yes
C2_1 C2_2 C5_1 C5_2 C8 C9 C13 C15 C18 C19 C22 C23 C27 C28 C31 C32 C34 C35_1 C35_2 C36_1 C36_2 C37_1 C37_2 C38_1 C38_2 C40: library part CC0603_100NF_16V_10%_X7R, "Non-polarised capacitor", Manufacturer Part Number=VJ0603Y104KXJCW1BC, DesignItemId=CC0603_100NF_16V_10%_X7R, Height=0.8mm, HelpURL=https://www.vishay.com/docs/28548/vjw1bcbascomseries.pdf, SMD=Yes
C3_1 C3_2 C6_1 C6_2: library part CC0603_100PF_50V_5%_X7R, "Non-polarised capacitor", Manufacturer Part Number=06035C101JAT2A, DesignItemId=CC0603_100PF_50V_5%_X7R, Height=0.8mm, HelpURL=https://www.mouser.pl/datasheet/2/40/KGM_X7R-3223212.pdf, SMD=Yes
C7 C10 C12 C16 C17 C20: library part CC0603_2U2F_16V_10%_X7R, "Non-polarised capacitor", Manufacturer Part Number=GRM188Z71C225KE43D, DesignItemId=CC0603_2U2F_16V_10%_X7R, Height=0.8mm, HelpURL=https://www.mouser.pl/datasheet/2/281/1/GRM188Z71C225KE43_01A-1985990.pdf, SMD=Yes
C14 C25 C39_1 C39_2: library part CC0603_DNP, "Non-polarised capacitor", Manufacturer Part Number=UNDEFINED, DesignItemId=CC0603_DNP, Height=0.8mm, SMD=Yes
C21 C24: library part CC0603_4U7F_16V_10%_X7R, "Non-polarised capacitor", Manufacturer Part Number=GRM188Z71C475KE21D, DesignItemId=CC0603_4U7F_16V_10%_X7R, Height=0.8mm, HelpURL=https://www.mouser.pl/datasheet/2/281/1/GRM188Z71C225KE43_01A-1985990.pdf, SMD=Yes
C30: library part CC0603_10UF_25V_10%_X7R, "Non-polarised capacitor", Manufacturer Part Number=GRM188R61E106KA73D, DesignItemId=CC0603_10UF_25V_10%_X7R, Height=0.8mm, HelpURL=https://www.mouser.pl/datasheet/2/281/1/GRM188R61E106KA73_01A-1985831.pdf, SMD=Yes
F1: library part "C1Q 1", "Fuse; Very Fast Acting; 1.5A; 125VAC, 63VDC; SMD;", Breaking capacity=50A, Current_rating=1.5A, Manufacturer 1 Component Height=0.58mm, Voltage_rating=125VAC/63VDC, DesignItemId="C1Q 1", Device="C1Q 1.5", Fuse type=Ceramic, HelpURL=https://www.mouser.pl/datasheet/2/643/ds-CP-c1q-series-1313102.pdf, Manufacturer Part Number="C1Q 1.5", SMD=Yes
J1 J2 J5 J6: "Coaxial Connectors SMA, Edge Mount, Female Receptacle, 0.062\" PCB Mount, Gold", Manufacturer 1 Component Height=7.92mm, DesignItemId=CONSMA020.062-G, HelpURL=https://www.mouser.pl/datasheet/2/418/9/ENG_DS_L9000279_01_A-3238972.pdf, Manufacturer Part Number=CONSMA020.062-G, SMD=Yes
J3_1 J3_2 J3_3 J4_1 J4_2 J4_3: "Coaxial Connectors VERTICAL PCB JACK GOLD PLATED BRASS", Manufacturer 1 Component Height=9.53mm, DesignItemId=901-144-8RFX, HelpURL=https://www.mouser.pl/datasheet/2/18/1/amph_s_a0001295158_1-2260876.pdf, Manufacturer Part Number=901-144-8RFX, SMD=No
L1_1 L1_2 L2_1 L2_2 L3 L4_1 L4_2 L5 L6_1 L6_2 L7_1 L7_2 L8: library part FB0603_120R@100MHZ_2A, "Ferrite Bead", Manufacturer 1 Component Height=0.8mm, Manufacturer Part Number=BLM18PG121SN1D, Tolerance=25%, DesignItemId=FB0603_120R@100MHZ_2A, HelpURL=https://www.tme.eu/Document/19a35c43258593752611d1c31a7dbf1a/MURATA-BLM18P.pdf, SMD=Yes
LD1 LD2 LD3 LD4: library part LED_0603_V_GREEN, "SMD mono-color Chip LED, Green, 0603", Manufacturer 1 Component Height=0.6mm, Manufacturer Part Number=HSME-C191, Color=Green, DesignItemId=LED_0603_V_GREEN, HelpURL=https://www.tme.eu/Document/898384df4a59fb78dfee2d27c6573b7a/HSME-C191.pdf, SMD=Yes
MH1 MH2 MH3 MH4: library part MH-M3, "Mounting hole, M3, no metalization", DesignItemId=MH-M3, Family=M3, Part Description="Mounting hole, M3, no metalization"
P1: library part SCREWERM_THT_2X1H_5P08MM, "Terminal Block, Right angle, 2 Positions, THT, Screw Connection, 10x9mm body", Manufacturer 1 Component Height=12.5mm, DesignItemId=SCREWERM_THT_2X1H_5P08MM, HelpURL=https://www.ptr.eu/en/products/connection-technology/terminal-blocks-screw-terminal-blocks/ak100ds-50-v-grey/, Manufacturer Part Number=SCREWTERM_THT_2X1H_5P08MM, SMD=No
P2 P3: "WR-PHD SMT Angled Dual Pin Header, 2.54mm, 2x6", Manufacturer 1 Component Height=5.23mm, DesignItemId=WURTH_610112249121, HelpURL=https://www.we-online.com/components/products/datasheet/610112249121.pdf, Manufacturer Part Number=WURTH_610112249121, SMD=Yes
R1_1 R1_2 R3_1 R3_2 R4_1 R4_2 R4_3 R7_1 R7_2 R8_1 R8_2 R9 R10 R11 R36 R37 R39 R41 R42 R47_1 R47_2 R47_3 R52_1 R52_2 R52_3 R53: library part R0402_DNP, "General Purpose Thick Film Chip Resistor", Manufacturer 1 Component Height=0.4mm, Voltage=50V, DesignItemId=R0402_DNP, HelpURL=https://www.vishay.com/docs/20035/dcrcwe3.pdf, SMD=Yes
R2_1 R2_2 R22 R34_1 R34_2: library part R0402_49R9_0.0625W_100PPM, "General Purpose Thick Film Chip Resistor", Manufacturer 1 Component Height=0.4mm, Manufacturer Part Number=RC0402FR-0749R9L, Tolerance=1%, Voltage=50V, DesignItemId=R0402_49R9_0.0625W_100PPM, HelpURL=https://www.mouser.pl/datasheet/2/447/PYu_RC_Group_51_RoHS_L_11-1984063.pdf, SMD=Yes
R5_1 R5_2 R6_1 R6_2 R27 R38 R40: library part R0402_0R_JUMPER, "General Purpose Thick Film Chip Resistor", Manufacturer 1 Component Height=0.4mm, Manufacturer Part Number=CRCW04020000Z0EDC, Tolerance=20mOhm, Voltage=50V, DesignItemId=R0402_0R_JUMPER, HelpURL=https://www.vishay.com/docs/20035/dcrcwe3.pdf, SMD=Yes
R12 R13 R14 R17 R18 R20: library part R0603_27R_0.1W_100PPM, "General Purpose Thick Film Chip Resistor", Manufacturer 1 Component Height=0.5mm, Manufacturer Part Number=WF06P270JTL, Tolerance=1%, Voltage=75V, DesignItemId=R0603_27R_0.1W_100PPM, HelpURL=https://www.vishay.com/docs/20035/dcrcwe3.pdf, SMD=Yes
R15 R16: library part R0603_10K_0.1W_100PPM, "General Purpose Thick Film Chip Resistor", Manufacturer 1 Component Height=0.5mm, Manufacturer Part Number=CQ03SAF1002T5E, Tolerance=1%, Voltage=75V, DesignItemId=R0603_10K_0.1W_100PPM, SMD=Yes
R19 R35: library part R0603_DNP, "General Purpose Thick Film Chip Resistor", Manufacturer 1 Component Height=0.5mm, Voltage=75V, DesignItemId=R0603_DNP, HelpURL=https://www.vishay.com/docs/20035/dcrcwe3.pdf, SMD=Yes
R21: library part R0603_0R_JUMPER, "General Purpose Thick Film Chip Resistor", Manufacturer 1 Component Height=0.5mm, Manufacturer Part Number=AC0603JR-070RL, Tolerance=20mOhm, Voltage=75V, DesignItemId=R0603_0R_JUMPER, HelpURL=https://www.tme.eu/Document/92aeee148d633aa67924e3cf8825e6b4/AC0402FR-0710KL.PDF, SMD=Yes
R23: library part R0603_1K_0.1W_100PPM, "General Purpose Thick Film Chip Resistor", Manufacturer 1 Component Height=0.5mm, Manufacturer Part Number=CQ03SAF1001T5E, Tolerance=1%, Voltage=75V, DesignItemId=R0603_1K_0.1W_100PPM, SMD=Yes
R24 R25 R26: library part R0603_100R_0.1W_100PPM, "General Purpose Thick Film Chip Resistor", Manufacturer 1 Component Height=0.5mm, Manufacturer Part Number=0603SAF1000T5E, Tolerance=1%, Voltage=50V, DesignItemId=R0603_100R_0.1W_100PPM, HelpURL=https://www.vishay.com/docs/20035/dcrcwe3.pdf, SMD=Yes
R28_1 R28_2 R30_1 R30_2: library part R0603_100k_0.1W_25PPM, "General Purpose Thick Film Chip Resistor", Manufacturer 1 Component Height=0.45mm, Manufacturer Part Number=RT0603BRD07100KL, Tolerance=0.10%, Voltage=75V, DesignItemId=R0603_100k_0.1W_25PPM, HelpURL=https://www.mouser.pl/datasheet/2/447/PYu_RT_1_to_0_01_RoHS_L_12-3003070.pdf, SMD=Yes
R29_1 R29_2 R31_1 R31_2 R32_1 R32_2 R33_1 R33_2: library part R0603_10k_0.1W_25PPM, "General Purpose Thick Film Chip Resistor", Manufacturer 1 Component Height=0.45mm, Manufacturer Part Number=RT0603BRD0710KL, Tolerance=0.10%, Voltage=75V, DesignItemId=R0603_10k_0.1W_25PPM, HelpURL=https://www.mouser.pl/datasheet/2/447/PYu_RT_1_to_0_01_RoHS_L_12-3003070.pdf, SMD=Yes
R43_1 R43_2 R43_3 R44_1 R44_2 R44_3 R48_1 R48_2 R48_3 R49_1 R49_2 R49_3: library part R0402_1R43_0.0625W_100PPM, "General Purpose Thick Film Chip Resistor", Manufacturer 1 Component Height=0.4mm, Manufacturer Part Number=CRCW04021R43FKED, Tolerance=1%, Voltage=50V, DesignItemId=R0402_1R43_0.0625W_100PPM, HelpURL=https://www.vishay.com/docs/20035/dcrcwe3.pdf, SMD=Yes
R45_1 R45_2 R45_3 R50_1 R50_2 R50_3: library part R0402_845R_0.0625W_100PPM, "General Purpose Thick Film Chip Resistor", Manufacturer 1 Component Height=0.4mm, Manufacturer Part Number=RC0402FR-07845RL, Tolerance=1%, Voltage=50V, DesignItemId=R0402_845R_0.0625W_100PPM, HelpURL=https://www.mouser.pl/datasheet/2/447/PYu_RC_Group_51_RoHS_L_11-1984063.pdf, SMD=Yes
R46_1 R46_2 R46_3 R51_1 R51_2 R51_3: library part R0402_53R6_0.0625W_100PPM, "General Purpose Thick Film Chip Resistor", Manufacturer 1 Component Height=0.4mm, Manufacturer Part Number=RC0402FR-0753R6L, Tolerance=1%, Voltage=50V, DesignItemId=R0402_53R6_0.0625W_100PPM, HelpURL=https://www.mouser.pl/datasheet/2/447/PYu_RC_Group_51_RoHS_L_11-1984063.pdf, SMD=Yes
T1: "30V P-Channel MOSFET", Manufacturer 1 Component Height=1.05mm, DesignItemId=AO3401A, Device=AO3401A, HelpURL=https://www.tme.eu/Document/d25b071532a0a1e329733a03427696ee/AO3401A-DTE.pdf, Manufacturer Part Number=AO3401A, SMD=Yes
T2 T3: "Transistor: N-MOSFET; unipolar; 30V; 2.9A; 0.9W; SOT23", Manufacturer 1 Component Height=1.05mm, DesignItemId=AO3406, Device=AO3406, HelpURL=https://www.tme.eu/Document/0f7dd37f1878b91445c27729186942d7/AO3406.pdf, Manufacturer Part Number=AO3406, SMD=Yes
TP1 TP2 TP3_1 TP3_2 TP4 TP5 TP6 TP7 TP8 TP9 TP10 TP11 TP12 TP13 TP14 TP15 TP16 TP17_1 TP17_2 TP18_1 TP18_2 TP19_1 TP19_2: library part TESTPOINT_SMD_C1P27MM, "1.27mm diameter SMD Test Point Area", DesignItemId=TESTPOINT_SMD_C1P27MM, Family=TestPoint, Part Description="1.27mm diameter SMD Test Point Area"
U1: "Signal Conditioning 50 ohm 2 terminal Power Splitter", Manufacturer 1 Component Height=0.5mm, DesignItemId=PS1608GT2-R50-T1, HelpURL=https://www.mouser.pl/datasheet/2/392/n_catalog_partition31_en-1660522.pdf, Manufacturer Part Number=PS1608GT2-R50-T1, SMD=Yes
U2_1 U2_2: "225-ps High-Speed Comparator with LVDS Outputs", Manufacturer 1 Component Height=0.8mm, Manufacturer Part Number=TLV3801DSG(_), Supplier Part Number 1=595-TLV3801DSGR, DesignItemId=TLV3801, Device=TLV3801, HelpURL=https://www.ti.com/lit/ds/symlink/tlv3801.pdf?ts=1690237794912, SMD=Yes, Supplier 1=Mouser, Supplier 2=Mouser, Supplier Part Number 2=595-TLV3801DSGT
U3: "Ultralow Noise, 200 mA Linear Regulator, 2.5V out", Manufacturer 1 Component Height=1mm, DesignItemId=ADM7160AUJZ-2.5, Device=ADM7160AUJZ-2.5, HelpURL=https://www.mouser.pl/datasheet/2/609/ADM7160-3120776.pdf, SMD=Yes
U4: "Switched Capacitor Inverter, Input Voltage: 2.7 V to 5.5 V, 200-mA Output Current", Manufacturer 1 Component Height=1.45mm, Manufacturer Part Number=LM2776DBV(_), DesignItemId=LM2776, Device=LM2776, HelpURL=https://www.ti.com/lit/ds/symlink/lm2776.pdf, SMD=Yes
U5: "LDO Voltage Regulators -30V, 200mA, low noise, Linear Reg, 2.5V", Manufacturer 1 Component Height=1mm, DesignItemId=ADP7182AUJZ-2.5, Device=ADP7182AUJZ-2.5, HelpURL=https://www.mouser.pl/datasheet/2/609/ADP7182-3122091.pdf, Manufacturer Part Number=ADP7182AUJZ-2.5, SMD=Yes
U6: "AD5623RBRMZ-3, Dual 12-/14-/16-Bit nanoDAC with 5 ppm/°C On-Chip Reference, 10-Pin MSOP", Manufacturer 1 Component Height=1.1mm, DesignItemId=AD5623RBRMZ-3, Device=AD5623RBRMZ-3, HelpURL=https://www.analog.com/media/en/technical-documentation/data-sheets/AD5623R_43R_63R.pdf, Manufacturer Part Number=AD5623RBRMZ-3, SMD=Yes
U7: "3.3V, 500 mA, Ultralow Noise, High PSRR,Fast Transient Response CMOS LDO, FIXED, LFCSP-8", Manufacturer 1 Component Height=0.8mm, Manufacturer Part Number=ADM7170ACPZ-3.3-R7, DesignItemId=ADM7170ACPZ-3.3, Device=ADM7170ACPZ-3.3, HelpURL=https://www.analog.com/media/en/technical-documentation/data-sheets/ADM7170.pdf, SMD=Yes
U8: "Precision Low Drift Low Noise Buffered Reference", Manufacturer 1 Component Height=1.1mm, Manufacturer Part Number=LTC6652BHMS8-1.25#PBF, DesignItemId=LTC6652BHMS8-1.25, Device=LTC6652BHMS8-1.25, HelpURL=https://www.analog.com/media/en/technical-documentation/data-sheets/6652fg.pdf, SMD=Yes
U9: "SINGLE INVERTER GATE", Manufacturer 1 Component Height=1.45mm, DesignItemId=SN74LVC1G04MDBVREP, Device=SN74LVC1G04MDBVREP, HelpURL=https://www.ti.com/lit/ds/symlink/txs0108e.pdf?ts=1625042999829&ref_url=https%253A%252F%252Fwww.google.com%252F, Manufacturer 1 Example=SN74LVC1G04MDBVREP, Manufacturer 1 Part Number=SN74LVC1G04MDBVREP, SMD=Yes
U10_1 U10_2 U11_1 U11_2: "VS = 1.8 V (±0.9 V) up to 5.5 V (±2.75 V),  350kHz, 2-?V VOS, 0.02-?V/°C, 17-?A, , Zero-Drift Series", Manufacturer 1 Component Height=1.1mm, DesignItemId=TLV333IDBV, Device=TLV333IDBV, HelpURL=https://www.ti.com/lit/ds/symlink/tlv333.pdf?ts=1691149914735&ref_url=https%253A%252F%252Fwww.ti.com%252Fproduct%252FTLV333, Manufacturer Part Number=TLV333IDBV, SMD=Yes
U12: "ADN4661BRZ, Single, 3 V, CMOS, LVDS, High Speed Differential Driver", Manufacturer 1 Component Height=1.75mm, DesignItemId=ADN4661BRZ, Device=ADN4661BRZ, HelpURL=https://www.analog.com/media/en/technical-documentation/data-sheets/ADN4661.pdf, Manufacturer Part Number=ADN4661BRZ, SMD=Yes
U13: "Overvoltage Protection Controller, 2.5V to 5.5V Operation, Reverse Voltage Protection", Manufacturer 1 Component Height=1mm, Manufacturer Part Number=LTC4360ISC8-2#TRMPBF, DesignItemId=LTC4360ISC8-2, Device=LTC4360ISC8-2, HelpURL=https://www.analog.com/media/en/technical-documentation/data-sheets/LTC4360-1-4360-2.pdf, SMD=Yes

## Nets (pads, with @x,y where several pads share a name; then routed paths per layer and width w, separated by ;. In a path a pad name is that pad's centre, name@x,y a point inside that pad or via, vN(x,y) a via of type N, cw(c..) or ccw(c..) an arc to the next point about the centre after c; other vN are vias at no path point)
BUF_IN: J2.1 R21.1
BUF_OUT_N: R37.1 R40.2 R42.2 R48_2.1
BUF_OUT_P: R36.1 R38.2 R41.2 R43_2.1
BUF_OUT_ZBRD_N: P2.4 R4_2.1 R49_2.2
BUF_OUT_ZBRD_P: P2.2 R4_2.2 R44_2.2
CLR: R15.1 R18.2 TP15.1 U6.5
CLR_ZBRD: P3.4 R18.1
COMP1_OUT_N: P2.3 R4_1.1 R49_1.2
COMP1_OUT_P: P2.1 R4_1.2 R44_1.2
COMP2_OUT_N: P2.7 R4_3.1 R49_3.2
COMP2_OUT_P: P2.5 R4_3.2 R44_3.2
COMP_OUT_1_N: R3_1.1 R6_1.2 R8_1.2 R48_1.1
COMP_OUT_1_P: R1_1.1 R5_1.2 R7_1.2 R43_1.1
COMP_OUT_2_N: R3_2.1 R6_2.2 R8_2.2 R48_3.1
COMP_OUT_2_P: R1_2.1 R5_2.2 R7_2.2 R43_3.1
DAC_VOUT_A: R32_1.1 TP1.1 U6.1
DAC_VOUT_B: R32_2.1 TP2.1 U6.2
DIN: R14.2 TP13.1 U6.8
GND: C1_1.2 C1_2.2 C2_1.2 C2_2.2 C3_1.2 C3_2.2 C4_1.2 C4_2.2 C5_1.2 C5_2.2 C6_1.2 C6_2.2 C7.2 C8.2 C9.2 C10.2 C12.2 C13.2 C15.2 C16.2 C17.2 C18.2 C19.2 C20.2 C21.2 C22.2 C23.2 C24.2 C25.2 C26.2 C27.2 C28.2 C29.2 C30.2 C31.2 C32.2 C33.2 C34.2 C35_1.2 C35_2.2 C36_1.2 C36_2.2 C38_1.2 C38_2.2 C39_1.2 C39_2.2 C40.2 J1.2 J2.2 J3_1.2 J3_2.2 J3_3.2 J4_1.2 J4_2.2 J4_3.2 J5.2 J6.2 LD1.1 LD2.1 LD3.1 MH1.MH MH2.MH MH3.MH MH4.MH P1.2 P2.9 P2.10 P3.9 P3.10 R2_1.1 R2_2.1 R7_1.1 R7_2.1 R8_1.1 R8_2.1 R11.1 R22.1 R26.2 R30_1.1 R30_2.1 R33_1.1 R33_2.1 R34_1.1 R34_2.1 R41.1 R42.1 R46_1.1 R46_2.1 R46_3.1 R47_1.1 R47_2.1 R47_3.1 R51_1.1 R51_2.1 R51_3.1 R52_1.1 R52_2.1 R52_3.1 U1.4 U2_1.2 U2_1.9 U2_2.2 U2_2.9 U3.2 U4.2 U5.1 U6.3 U7.6 U7.9 U8.4 U8.5 U8.7 U8.8 U9.3 U10_1.2 U10_2.2 U12.4 U13.2 U13.3 U13.4
IN+_1: R2_1.2 R39.1 U1.2 U2_1.5
IN+_2: R2_2.2 R29_2.2 TP3_2.1 U2_2.5 U11_2.1
IN-_1: R29_1.2 R34_1.2 TP3_1.1 U2_1.4 U11_1.1
IN-_2: R34_2.2 R53.2 U1.3 U2_2.4
LDAC: R16.1 R17.2 TP14.1 U6.4
LDAC_ZBRD: P3.2 R17.1
N2V5: C14.1 C15.1 C16.1 L2_1.1 L2_2.1 L6_1.1 L6_2.1 LD4.1 R9.2 TP5.1 U5.5
N2V5_COMP: C4_1.1 C4_2.1 C5_1.1 C5_2.1 C6_1.1 C6_2.1 L2_1.2 L2_2.2 U2_1.3 U2_2.3
N2V5_OPA_2: C36_1.1 C36_2.1 C37_1.2 C37_2.2 L6_1.2 L6_2.2 U11_1.2 U11_2.2
NetC9_1: C9.1 C10.1 C12.1 C13.1 TP4.1 U4.1 U5.2 U5.3
NetC11_1: C11.1 U4.5
NetC11_2: C11.2 U4.6
NetC14_2: C14.2 R10.1
NetC25_1: C25.1 U7.4
NetC39_1_1: C39_1.1 R28_1.1 R30_1.2 TP18_1.1 U10_1.3
NetC39_2_1: C39_2.1 R28_2.1 R30_2.2 TP18_2.1 U10_2.3
NetF1_1: F1.1 P1.1 TP9.1
NetF1_2: F1.2 T1.3
NetJ1_1: J1.1 U1.1
NetJ3_1_1: J3_1.1 R45_1.1 R46_1.2 R47_1.2
NetJ3_2_1: J3_2.1 R45_2.1 R46_2.2 R47_2.2
NetJ3_3_1: J3_3.1 R45_3.1 R46_3.2 R47_3.2
NetJ4_1_1: J4_1.1 R50_1.1 R51_1.2 R52_1.2
NetJ4_2_1: J4_2.1 R50_2.1 R51_2.2 R52_2.2
NetJ4_3_1: J4_3.1 R50_3.1 R51_3.2 R52_3.2
NetJ5_1: J5.1 R39.2
NetJ6_1: J6.1 R53.1
NetLD1_2: LD1.2 R23.1
NetLD2_2: LD2.2 R24.1
NetLD3_2: LD3.2 R25.1
NetLD4_2: LD4.2 R26.1
NetR5_1_1: R5_1.1 U2_1.8
NetR5_2_1: R5_2.1 U2_2.8
NetR6_1_1: R6_1.1 U2_1.1
NetR6_2_1: R6_2.1 U2_2.1
NetR9_1: R9.1 R10.2 R11.2 U5.4
NetR19_1: R19.1 R21.2 R22.2 U9.2
NetR19_2: R19.2 R20.1 U9.4
NetR20_2: R20.2 R35.1 TP16.1 U12.2
NetR29_1_1: R29_1.1 R31_1.2 U11_1.4
NetR29_2_1: R29_2.1 R31_2.2 U11_2.4
NetR31_1_1: R31_1.1 TP17_1.1 U10_1.1 U10_1.4
NetR31_2_1: R31_2.1 TP17_2.1 U10_2.1 U10_2.4
NetR32_1_2: R32_1.2 R33_1.2 TP19_1.1 U11_1.3
NetR32_2_2: R32_2.2 R33_2.2 TP19_2.1 U11_2.3
NetR35_2: R35.2 R38.1 U12.7
NetR40_1: R40.1 U12.8
NetR43_1_2: R43_1.2 R44_1.1 R45_1.2
NetR43_2_2: R43_2.2 R44_2.1 R45_2.2
NetR43_3_2: R43_3.2 R44_3.1 R45_3.2
NetR48_1_2: R48_1.2 R49_1.1 R50_1.2
NetR48_2_2: R48_2.2 R49_2.1 R50_2.2
NetR48_3_2: R48_3.2 R49_3.1 R50_3.2
NetT1_1: T1.1 U13.8
NetT1_2: T1.2 T2.3 U13.1
NetT2_1: T2.1 T3.1 U13.7
NetT2_2: T2.2 T3.2
P2V5: C19.1 C20.1 L1_1.1 L1_2.1 L4_1.1 L4_2.1 L7_1.1 L7_2.1 R1_1.2 R1_2.2 R3_1.2 R3_2.2 R24.2 R36.2 R37.2 TP6.1 U3.5
P2V5_COMP: C1_1.1 C1_2.1 C2_1.1 C2_2.1 C3_1.1 C3_2.1 L1_1.2 L1_2.2 U2_1.6 U2_1.7 U2_2.6 U2_2.7
P2V5_OPA_1: C38_1.1 C38_2.1 L7_1.2 L7_2.2 U10_1.5 U10_2.5
P2V5_OPA_2: C35_1.1 C35_2.1 C37_1.1 C37_2.1 L4_1.2 L4_2.2 U11_1.5 U11_2.5
P3V3: C23.1 C24.1 C26.1 C27.1 L3.1 L5.1 L8.1 R15.2 R16.2 R25.2 TP7.1 U7.1 U7.2 U7.3 U8.2 U8.3
P3V3_Buffer: C34.1 L5.2 U9.5
P3V3_DAC: C30.1 C31.1 L3.2 U6.9
P3V3_LVDS_DRV: C33.1 C40.1 L8.2 U12.1
P3V3_ZedBoard: P2.11 P2.12 P3.11 P3.12
P5V0: C7.1 C8.1 C17.1 C18.1 C21.1 C22.1 R23.2 T3.3 U3.1 U3.3 U4.3 U4.4 U7.5 U7.7 U7.8 U13.6
SCLK: R13.2 TP12.1 U6.7
SERIAL.\S\Y\N\C\: P3.1 R12.1
SERIAL.DIN: P3.5 R14.1
SERIAL.SCLK: P3.3 R13.1
SYNC: R12.2 TP11.1 U6.6
VREF_DAC: C32.1 R27.2 R28_1.2 R28_2.2 TP10.1 U6.10
VREF_P1V25: C28.1 C29.1 R27.1 TP8.1 U8.6
pads on no net: P2. P2.6 P2.8 P3. P3.6 P3.7 P3.8 U1. U3.4 U8.1 U9.1 U12.3 U12.5 U12.6 U13.5

## Text inside footprints (layer, text, board x,y; h text height)
J1: Mechanical 1 "PCB edge" at 10564.12,1686.82 h7.87; Mechanical 1 "PCB edge" at 11048.4,1687.98 h7.87
J2: Mechanical 1 "PCB edge" at 8334.12,1686.82 h7.87; Mechanical 1 "PCB edge" at 8818.4,1687.98 h7.87
J5: Mechanical 1 "PCB edge" at 12349.12,1686.82 h7.87; Mechanical 1 "PCB edge" at 12833.4,1687.98 h7.87
J6: Mechanical 1 "PCB edge" at 9189.12,1686.82 h7.87; Mechanical 1 "PCB edge" at 9673.4,1687.98 h7.87